# Altium PCB usb-dongle.PcbDoc
Units mm, origin at the board's own origin, x right, y up, seen from the top; angles counter-clockwise.
Board outline 38.85 x 16.25 mm, 2 copper layers (Top Layer, Bottom Layer), stack 0.791 mm thick; 32 components, 21 nets, 136 pads, 141 vias.
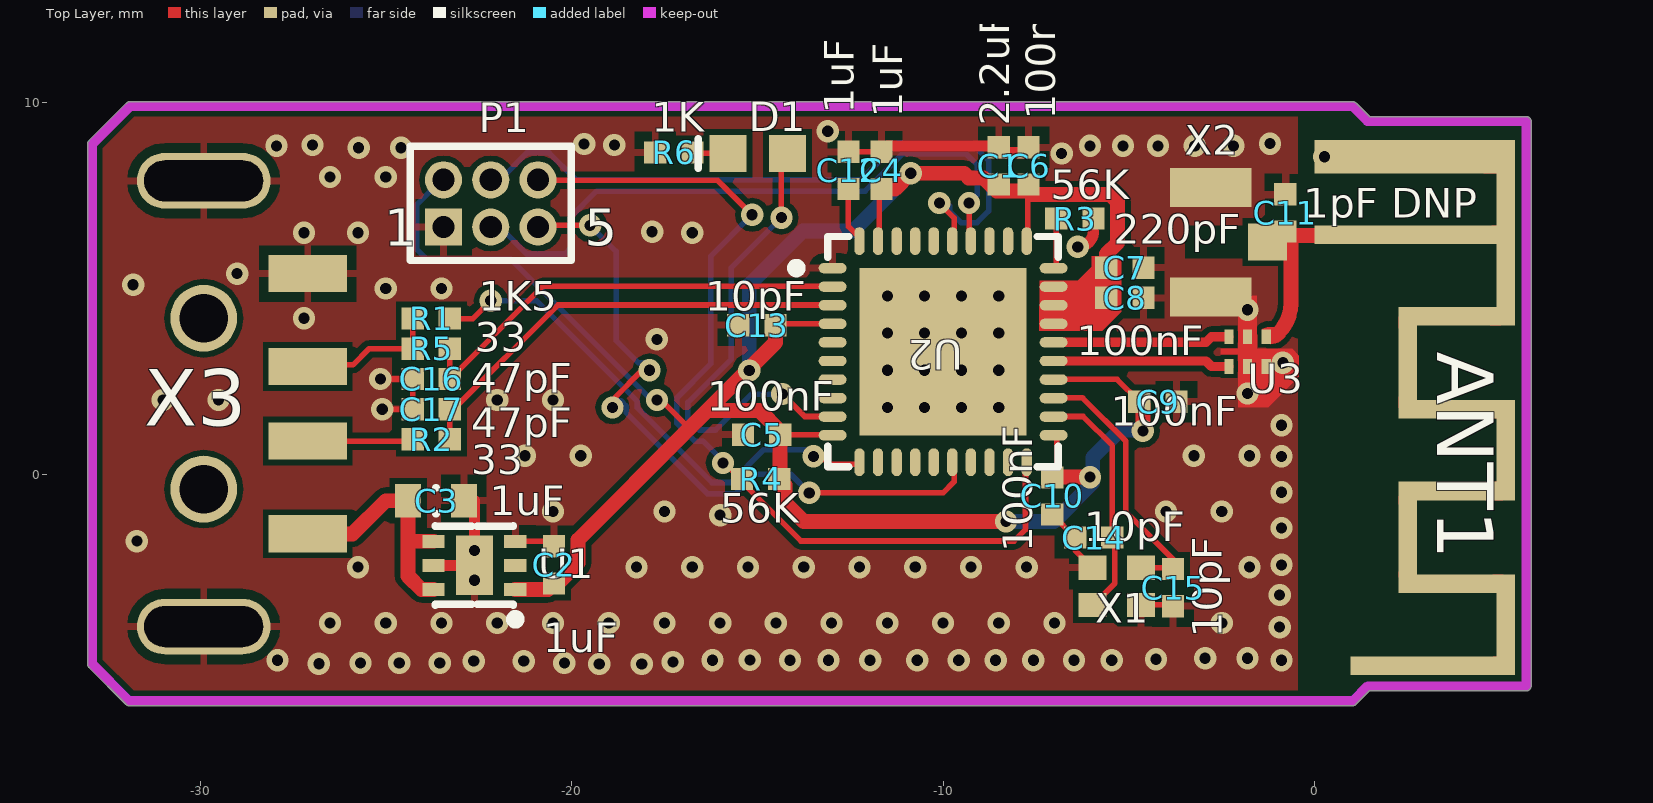
[diagram p0: Top Layer view]
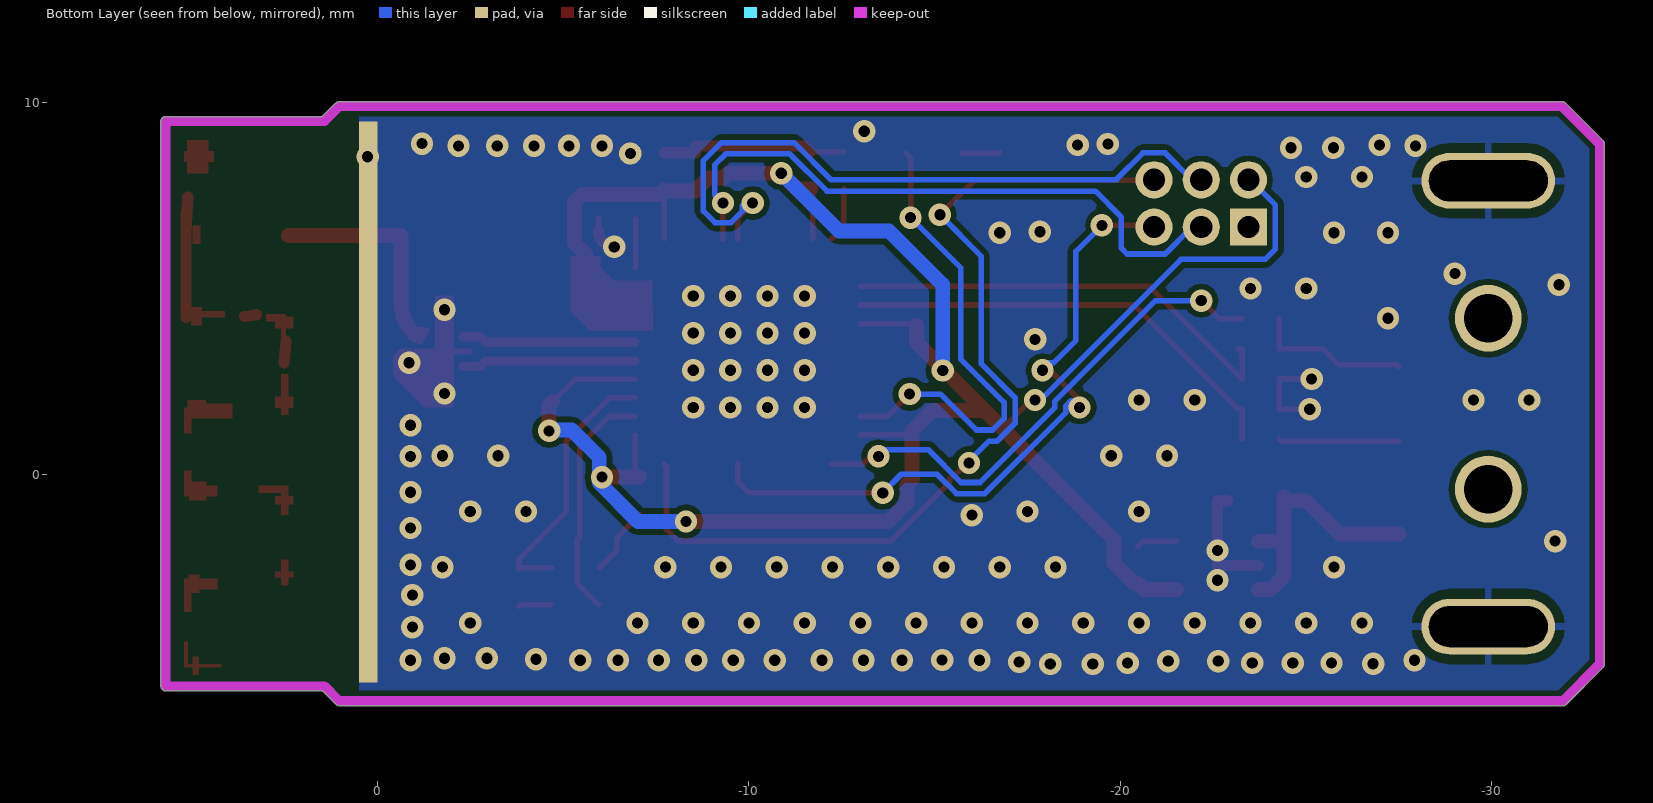
[diagram p1: Bottom Layer view, seen from below]

## Layer stack, top to bottom
Top Solder: solder mask 0.0102, Solder Resist, Dk 3.5
Top Layer: signal copper 0.0356
Dielectric1: core 0.72, FR-4, Dk 4.8
Bottom Layer: signal copper 0.0356
Bottom Solder: solder mask 0.0102, Solder Resist, Dk 3.5

## Board outline
-31.996,-6.19 -32.987,-5.199 -32.987,-5.2 cw(c-32.897,-5.109) -33.025,-5.109 -33.025,8.891 cw(c-32.897,8.891) -32.987,8.982 -32.987,8.981 -31.978,9.99 -31.979,9.99 cw(c-31.888,9.9) -31.888,10.027 1.029,10.027 cw(c1.029,9.9) 1.12,9.99 1.482,9.627 5.7,9.627 cw(c5.7,9.5) 5.827,9.5 5.827,-5.7 cw(c5.7,-5.7) 5.7,-5.827 1.48,-5.827 1.117,-6.19 1.118,-6.19 cw(c1.027,-6.1) 1.027,-6.227 -31.906,-6.227 cw(c-31.906,-6.1)

## Design rules (kind name [scope] priority, off if disabled: settings)
AcuteAngle [All] p1 off: minimum=8.80000000000000E+0001 checktracksonly=FALSE
Clearance Clearance_balun [All vs HasFootprint('LFB182G45BG2D280')] p1: gap=0.1
Clearance Clearance_Normal [All] p2: gap=0.15
ComponentClearance [All] p1: gap=0.2 collisioncheckmode=3 verticalgap=0.2 showdistances=FALSE
FabricationTestPointUsage TestPointUsage [All] p1: valid=0 allowmultiple=FALSE
FabricationTestpoint Testpoint [All] p1: side=3 testpointundercomponent=TRUE minsize=1.016 maxsize=2.54 preferedsize=1.524 minholesize=0 maxholesize=1.016 preferedholesize=0.813 testpointgrid=0.025 allowsidetop=TRUE allowsidebottom=TRUE usegrid=TRUE gridtolerance=0
Height [All] p1 off: minheight=0 maxheight=25.4 prefheight=12.7
HoleSize [All] p1: absolutevalues=TRUE maxlimit=6 minlimit=0.3 maxpercent=80.000 minpercent=20.000
MinimumAnnularRing [All] p1: minimumring=0.15
MinimumSolderMaskSliver [All] p1: minsoldermaskwidth=0.2
PlaneClearance [All] p1: clearance=0.4
PlaneConnect [All] p1: planeconnectstyle=Relief reliefexpansion=0.508 reliefentries=4 reliefconductorwidth=0.2 reliefairgap=0.254
PolygonConnect ufl-plane [InNet('GND') vs HasFootprint('U.FL-R-SMT-1')] p1: connectstyle=Direct reliefconductorwidth=0.254 reliefentries=4 polygonreliefangle="90 Angle" airgapwidth=0.254
PolygonConnect balun_plane [All vs InComponent('U3')] p2: connectstyle=Direct reliefconductorwidth=0.254 reliefentries=4 polygonreliefangle="90 Angle" airgapwidth=0.254
PolygonConnect mifa_plane [InNet('GND') vs HasFootprint('MIFA-2.4GHZ')] p3: connectstyle=Direct reliefconductorwidth=0.254 reliefentries=4 polygonreliefangle="90 Angle" airgapwidth=0.254
PolygonConnect PolygonConnect_Via [IsVia] p4: connectstyle=Direct reliefconductorwidth=0.254 reliefentries=4 polygonreliefangle="90 Angle" airgapwidth=0.254
PolygonConnect [All] p5: connectstyle=Relief reliefconductorwidth=0.2 reliefentries=4 polygonreliefangle="90 Angle" airgapwidth=0.254
RoomDefinition schematic [InComponentClass('schematic')] p1 off: confinementstyle=ConfineIn formatcopy=TRUE lockcomponents=FALSE outline -250,-250 -199.2,-250 -199.2,-224.6 -250,-224.6
RoutingCorners [All] p1: cornerstyle=45-Degree minsetback=1 maxsetback=2.54
RoutingVias [All] p1: holewidth=0.3 width=0.6 viastyle="Through Hole" minholewidth=0.3 minwidth=0.6 maxholewidth=1 maxwidth=4
SMDToCorner [All] p1 off: distance=78740
SMDToPlane [All] p1 off: distance=118110
SilkToSilkClearance [All] p1: silktosilkclearance=0.2
SilkToSolderMaskClearance SilkscreenOverComponentPads [IsPad] p1: minsilkscreentomaskgap=0.2 clearancetoexposedcopper=TRUE
SolderMaskExpansion SolderMaskExpansion_Via [isVia] p1: expansion=-5
SolderMaskExpansion [All] p2: expansion=0.05
ViasUnderSMD [All] p1: allowed=TRUE
Width [All] p1: maxlimit=5 minlimit=0.15 preferedwidth=0.2 minimp=50.000000 maximp=50.000000 favimp=50.000000
18 further rules are at their usual default settings.

## Components (designator, comment, footprint, x,y, rotation, side; value= is the part's Value field where it differs from the comment)
ANT1 "MIFA" MIFA-2.4GHZ 0,9 r270 top locked net-tie
C1 "2.2uF" CAPC1005X05L -8.5,8.3 r90 top
C2 "1uF" CAPC1005X05L -20.472,-2.438 r90 top
C3 "1uF" CAPC1608X08L -23.647,-0.711 r0 top
C4 "1uF" CAPC1005X05L -11.659,8.179 r90 top
C5 "100nF" CAPC1005X05L -14.884,1.067 r180 top
C6 "100nF" CAPC1005X05L -7.7,8.3 r90 top
C7 "220pF" CAPC1005X05L -5.105,5.563 r0 top
C8 "100nF" CAPC1005X05L -5.105,4.75 r0 top
C9 "100nF" CAPC1005X05L -4.216,1.956 r0 top
C10 "100nF" CAPC1005X05L -7.061,-0.584 r270 top
C11 "1pF DNP" CAPC1005X05L -0.787,7.036 r90 top
C12 "1uF" CAPC1005X05L -12.548,8.179 r90 top
C13 "10pF" CAPC1005X05L -15.011,4.013 r180 top
C14 "10pF" CAPC1005X05L -5.944,-1.702 r180 top
C15 "10pF" CAPC1005X05L -3.81,-3.048 r270 top
C16 "47pF" CAPC1005X05L -23.774,2.565 r180 top
C17 "47pF" CAPC1005X05L -23.774,1.753 r180 top
D1 "19-21SURC/S530-A3/TR8" DIOC1608X08N -14.986,8.636 r0 top
P1 "MHDR2X3" MHDR2X3 -23.444,6.655 r0 top
R1 "1K5" RESC1005X04L -23.774,4.191 r0 top
R2 "33" RESC1005X04L -23.774,0.94 r180 top
R3 "56K" RESC1005X04L -6.452,6.883 r180 top
R4 "56K" RESC1005X04L -14.91,-0.127 r180 top
R5 "33" RESC1005X04L -23.774,3.378 r180 top
R6 "1K" RESC1005X04L -17.247,8.661 r0 top
U1 "TPS781330220DRVR" QFN65P200X200X80-6N -22.614,-2.453 r90 top
U2 "CC2531F256RHAR" QFN50P600X600X100-40L-2 -10,3.3 r0 top
U3 "LFB182G45BG2D280" LFB182G45BG2D280 -1.803,3.302 r0 top
X1 "ABM11-32.000MHZ-B7G-T" Abracon-ABM11 -4.674,-2.515 r0 top
X2 "UFL" U.FL-R-SMT-1 -2.794,6.248 r90 top
X3 "1001-011-01101" 1001-011-01101 -29.9,1.9 r90 top

## Footprints (in the part's own frame and the unit in brackets; to place one, negate y for a bottom-side part, rotate by r counter-clockwise, add the part's x,y. Pads: shape width x height; smd on the part's side, far side on the other; paste and mask are expansions set on the pad)
1001-011-01101 [mm] "CNC Tech CONN USB A TYPE ULTRA FLAT SMD"
  round 1.8 hole 1.3 unplated: 0(-2.3,0) 0(2.3,0)
  rect 1x2.1 smd: 1(-3.5,-2.8) 2(-1,-2.8) 3(1,-2.8) 4(3.5,-2.8)
  oval 1.5x3.6 hole 1.1 slot 3.2 at 90 deg: 5(-6,0) 6(6,0)
  body extent -6.2,-3.27 6.2,18.7, height 3.2
Abracon-ABM11 [mm]
  rect 0.75x0.65 smd: 0(-1.3,0) 0(0,-1) 1(-1.3,-1) 2(0,0)
  body extent -1.65,-1.3 0.35,0.3, height 0.59
CAPC1005X05L [mm] "Chip Capacitor, Body 1.1x0.5mm, IPC High Density, EIA 0402"
  rect 0.6x0.6 smd: 1(-0.5,0) 2(0.5,0)
  body extent -0.55,-0.3 0.55,0.3, height 0.6
CAPC1608X08L [mm] "Chip Capacitor, Body 1.6x0.8mm, IPC High Density, EIA 0603"
  rect 0.7x0.9 smd: 1(-0.75,0) 2(0.75,0)
  silkscreen extent -0.01,-0.35 0.01,0.35, body extent -0.9,-0.48 0.9,0.48, height 0.95
DIOC1608X08N [mm] "Chip Diode, Body 1.6x0.8mm, IPC Medium Density"
  rect 1x1 smd: 1(-0.8,0) 2(0.8,0)
  silkscreen extent -1.6,-0.4 -1.6,0.4, body extent -0.87,-0.48 0.87,0.48, height 0.85
LFB182G45BG2D280 [mm] "Murata Balun"
  rect 0.25x0.4 smd mask+0: 1(0.5,0.4) 2(0,0.4) 3(-0.5,0.4) 4(-0.5,-0.4) 5(0,-0.4) 6(0.5,-0.4)
  Top Layer region: -0.251,-0.395 -0.251,-1.5 -0.25,-1.5 -0.249,-1.498 0.561,-1.498 1.382,-0.677
  Top Layer region: -0.25,1.499 -0.25,0.027 -0.236,0.013 0.242,0.013 0.25,0.021 0.25,1.499 0.251,1.5
  Top Layer region: -0.724,0.075 1.202,0.075 1.382,-0.106 1.382,-0.677 -0.215,-0.677 -0.236,-0.664 -0.251,-0.641 -0.251,-0.15 -0.251,-0.069 -0.333,-0.067 -0.721,-0.067
  body extent -0.85,-0.45 0.85,0.45, height 0.7
MHDR2X3 [mm] "Connector; Header; 3x2 Position"
  rect 1x1 hole 0.6: 1(0,0)
  round 1 hole 0.6: 2(0,1.27) 3(1.27,0) 4(1.27,1.27) 5(2.54,0) 6(2.54,1.27)
  silkscreen extent -0.9,-0.9 3.44,2.17
MIFA-2.4GHZ [mm]
  rect 0.9x4.9 smd paste-100 mask-100: 0(0.45,2.45)
  rect 5x0.5 smd paste-100 mask-100: 0(2.5,5.15)
  rect 0.5x2.64 smd paste-100 mask-100: 0(4.75,3.58) 0(7.251,3.58) 0(9.45,3.58) 0(11.95,3.58)
  rect 2x0.5 smd paste-100 mask-100: 0(6,2.51) 0(10.7,2.51)
  rect 15.1x0.5 smd far side paste-100 mask-100: 0(7.05,0.25)
  rect 2.7x0.5 smd paste-100 mask-100: 0(8.35,5.15) 0(13.05,5.15)
  rect 0.5x3.94 smd paste-100 mask-100: 0(14.15,2.93)
  rect 0.5x4.9 smd paste-100 mask-100: 1(2.55,2.45)
  Top Layer region: 9.588,2.261 9.814,2.261 9.814,2.761 9.588,2.761
  Top Layer region: 13.901,4.799 14.401,4.799 14.401,4.981 13.901,4.981
  Top Layer region: 4.756,2.26 5.07,2.26 5.07,2.76 4.756,2.76
  Top Layer region: 6.9,2.26 7.214,2.26 7.214,2.76 6.9,2.76
  Top Layer region: 4.5,4.722 5,4.722 5,5.016 4.5,5.016
  Top Layer region: 2.3,4.764 2.8,4.764 2.8,4.976 2.3,4.976
  Top Layer region: 0,4.544 0.9,4.544 0.9,5.13 0,5.13
  Top Layer region: 7,4.618 7.5,4.618 7.5,5.106 7,5.106
  Top Layer region: 9.2,4.601 9.7,4.601 9.7,5.067 9.2,5.067
  Top Layer region: 11.621,2.26 11.781,2.26 11.781,2.76 11.621,2.76
  Top Layer region: 11.7,4.786 12.2,4.786 12.2,5.088 11.7,5.088
QFN50P600X600X100-40L-2 [mm] "QFN, 40-Leads, Body 6.2x6.2mm (max), Pitch 0.50mm, IPC High Density"
  rect 4.5x4.5 smd paste-1.75 mask+0: 0(0,0)
  oval 0.75x0.28 smd paste-0.025 mask+0.05: 1(-2.975,2.25) 2(-2.975,1.75) 3(-2.975,1.25) 4(-2.975,0.75) 5(-2.975,0.25) 6(-2.975,-0.25) 7(-2.975,-0.75) 8(-2.975,-1.25) 9(-2.975,-1.75) 10(-2.975,-2.25) 21(2.975,-2.25) 22(2.975,-1.75) 23(2.975,-1.25) 24(2.975,-0.75) 25(2.975,-0.25) 26(2.975,0.25) 27(2.975,0.75) 28(2.975,1.25) 29(2.975,1.75) 30(2.975,2.25)
  oval 0.28x0.75 smd paste-0.025 mask+0.05: 11(-2.25,-2.975) 12(-1.75,-2.975) 13(-1.25,-2.975) 14(-0.75,-2.975) 15(-0.25,-2.975) 16(0.25,-2.975) 17(0.75,-2.975) 18(1.25,-2.975) 19(1.75,-2.975) 20(2.25,-2.975) 31(2.25,2.975) 32(1.75,2.975) 33(1.25,2.975) 34(0.75,2.975) 35(0.25,2.975) 36(-0.25,2.975) 37(-0.75,2.975) 38(-1.25,2.975) 39(-1.75,2.975) 40(-2.25,2.975)
  silkscreen extent -4.07,-3.1 3.1,3.1, body extent -3.08,-3.08 3.08,3.08, height 1
QFN65P200X200X80-6N [mm] "QFN, 6-Leads, Body 2.1x2.1mm (max), Pitch 0.65mm, IPC Medium Density"
  rect 0.35x0.6 smd paste-0.05 mask+0.07: 1(-0.65,-1.1) 2(0,-1.1) 3(0.65,-1.1) 4(0.65,1.1) 5(0,1.1) 6(-0.65,1.1)
  rect 1.6x1 smd paste-0.1: 7(0,0)
  silkscreen extent -1.57,-1.23 1.07,1.05, body extent -1.05,-1.05 1.05,1.05, height 0.8
RESC1005X04L [mm] "Chip Resistor, Body 1.1x0.5mm, IPC High Density, EIA 0402"
  rect 0.6x0.6 smd: 1(-0.5,0) 2(0.5,0)
  body extent -0.55,-0.3 0.55,0.3, height 0.4
U.FL-R-SMT-1 [mm]
  rect 1.05x2.2 smd paste-5: 0(-1.475,0) 0(1.475,0)
  rect 1x1.05 smd paste-5: 1(0,-1.525)
  body extent -1.5,-1.5 1.49,1.51, height 1.25

## Part data
ANT1: library part MIFA_Antenna
C1: library part 220nF[[/\]]0603[[/\]]1, "Capacitor"
C2 C4 C12: library part 1uF[[/\]]0402[[/\]]1, "Capacitor"
C3: library part 1uF[[/\]]0603[[/\]]1, "Capacitor"
C5 C6 C7 C8 C9 C10 C13: library part 100nF[[/\]]0402[[/\]]1, "Capacitor"
C11 C14 C15 C16 C17: library part 15pF[[/\]]0402[[/\]]1, "Capacitor"
D1: library part LED, "SMD Red 0603 2V@20ma 56 mcd"
P1: "Header, 3-Pin, Dual row"
R1 R2 R3 R4 R5 R6: library part 0R[[/\]]0402[[/\]]1, "Resistor"
U1: library part TPS781, "150mA LDO"
U2: library part cc2531, "System-on-Chip Solution for IEEE 802.15.4"
U3: library part 2450BM15A0002, "Balun for CC253x"
X1: "32Mhz Crystal, 15ppm"
X2: library part U.FL-R-SMT-1
X3: library part USB-A-Device, "USB CONNECTOR, A TYPE"

## Via types
v1: diameter 0.6, hole 0.3, Top Layer to Bottom Layer, 116 vias
v2: diameter 0.6, hole 0.3, Top Layer to Bottom Layer, tented bottom, 18 vias
v3: diameter 0.6, hole 0.3, Top Layer to Bottom Layer, tented both sides, 7 vias

## Nets (pads, with @x,y where several pads share a name; then routed paths per layer and width w, separated by ;. In a path a pad name is that pad's centre, name@x,y a point inside that pad or via, vN(x,y) a via of type N, cw(c..) or ccw(c..) an arc to the next point about the centre after c; other vN are vias at no path point)
3.3V: C1.1 C2.1 C4.1 C5.1 C6.1 C7.1 C8.1 C9.1 C10.1 C13.1 P1.2 R4.1 U1.1 U2.4 U2.10 U2.21 U2.24 U2.27 U2.28 U2.29 U2.31 U2.39 | length 66.1
  Top Layer w0.15: v1(-17.7,2) v1@-17.7,2.104 ; v1@-17.648,2.052 -16.84,1.245 -16.815,1.245 ; C13.1 -14.469,4.056 U2.4@-12.999,4.056 ; C5.1 -13.01,1.067 U2.10@-12.999,1.056 ; U2.39@-11.717,6.338 -11.717,7.621 C4.1 ; C6.1@-7.722,7.653 -7.717,7.648 U2.31@-7.717,6.338 ; C10.1 -7.053,-0.076 -6.934,0.043 U2.21@-6.934,1.056 ; U2.24@-6.934,2.556 -5.317,2.556 C9.1
  Top Layer w0.4: U1.1 -20.637,-3.103 C2.1 -20.377,-2.938 -19.822,-2.383 -19.822,-1.763 -16.815,1.245 -16.343,1.717 ; C13.1 -14.511,3.548 -16.343,1.717 ; C4.1 -11.295,7.679 v1(-10.871,8.103) -9.435,8.103 -9.311,7.978 -8.91,7.978 -8.56,7.628 -7.747,7.628 C6.1@-7.722,7.653 ; v1(-8.306,-1.27) -13.749,-1.27 -14.25,-0.769 -14.25,-0.287 R4.1 -14.384,-0.102 C5.1 -14.384,1.162 -14.939,1.717 -16.343,1.717 ; C6.1@-7.717,7.648 -7.602,7.533 -5.507,7.533 -5.302,7.328 -5.302,6.233 -5.605,5.93 C7.1 C8.1 ; C10.1@-7.053,-0.076 v1(-6.045,-0.076) ; C9.1 -4.623,1.862 v1(-4.623,1.168)
  Bottom Layer w0.15: P1.2 -23.492,7.925 -24.169,7.248 -24.169,6.062 -23.894,5.786 -21.629,5.786 v1@-17.842,2
  Bottom Layer w0.4: v1(-15.215,2.794) -15.215,5.105 -13.767,6.553 -12.421,6.553 v1(-10.871,8.103) ; v1(-8.306,-1.27) -7.01,-1.27 -5.969,-0.229 -5.969,0.457 -5.232,1.194 v1@-4.623,1.194
DBG_C: P1.3 U2.34 | length 17.2
  Top Layer w0.15: U2.34@-9.3,6.325 v3(-9.3,7.3)
  Bottom Layer w0.15: P1.3 -21.93,6.655 -21.205,5.93 -20.179,5.93 -20.025,6.084 -20.025,6.917 -19.322,7.62 -12.096,7.62 -11.089,8.628 -9.384,8.628 -9.076,8.32 -9.076,7.524 v3(-9.3,7.3)
DBG_D: P1.4 U2.35 | length 18.6
  Top Layer w0.15: v3(-10.1,7.3) -9.7,6.9 U2.35@-9.7,6.325
  Bottom Layer w0.15: P1.4@-21.93,7.925 -21.205,8.65 -20.604,8.65 -19.9,7.946 ; -19.9,7.925 -12.216,7.925 -11.213,8.928 -9.259,8.928 -8.775,8.443 -8.775,7.083 -9.083,6.775 -9.517,6.775 -9.825,7.083 -9.825,7.225 -9.9,7.3 v3(-10.1,7.3)
GND: ANT1.0 C1.2 C2.2 C3.2 C4.2 C5.2 C6.2 C7.2 C8.2 C9.2 C10.2 C11.2 C12.2 C13.2 C14.2 C15.2 C16.2 C17.2 P1.1 R3.1 R6.1 U1.3 U1.5 U1.7 U2.0 U2.1 U3.2 U3.5 U3.6 X1.0 X2.0 X3.4 X3.5 X3.6 | length 20.3
  Top Layer w0.15: v1(-25.146,2.565) C16.2 C17.2 v1(-25.095,1.753) ; U1.3 -20.607,-1.803 C2.2 ; C12.2 C4.2 ; C1.2@-8.56,8.628 -8.56,8.653 C1.2@-8.56,8.839 ; C10.2 C14.2 -6.444,-2.045 X1.0@-5.974,-2.515 ; -5.952,6.545 R3.1 ; X1.0@-4.674,-3.515 -3.843,-3.515 C15.2
  Top Layer w0.3: U1.5 U1.7 v2(-22.614,-2.053) -22.614,-0.711 C3.2 ; C4.2 -11.498,8.839 C1.2@-8.56,8.839 ; C1.2@-8.56,8.653 C6.2@-7.722,8.653 ; v1(-6.375,6.121) ccw(c-6.375,6.545) -5.952,6.545 ; ANT1.0@2.464,3.581 ANT1.0@2.51,3 ; ANT1.0@3.251,4.293 ANT1.0@3.58,4.25 ; ANT1.0@5.105,7.468 ANT1.0@5.15,6.5 ; ANT1.0@5.156,4.216 ANT1.0@5.15,6.5 ; ANT1.0@5.156,7.036 ANT1.0@5.15,6.5
  other v1: -26.8,-5.1 -19.253,-5.105 -18.11,-5.105 -25.679,-5.08 -24.638,-5.08 -23.546,-5.08 -20.193,-5.08 -17.272,-5.055 -22.631,-5.029 -21.285,-5.029 -27.915,-5.004 -16.205,-5.004 -15.2,-5 -14.122,-5.004 -13.081,-5.004 -11.963,-5.004 -10.693,-5.004 -9.576,-5.004 -8.585,-5.004 -7.569,-5.004 -6.477,-5.004 -5.461,-5.004 -0.889,-5.004 -4.267,-4.978 -2.946,-4.953 -1.803,-4.953 -0.94,-4.115 -26.5,-4 -25,-4 -23.5,-4 -22,-4 -20.5,-4 -19,-4 -17.5,-4 -16,-4 -14.5,-4 -13,-4 -11.5,-4 -10,-4 -8.5,-4 -7,-4 -2.5,-4 -0.94,-3.251 -25.75,-2.5 -18.25,-2.5 -16.75,-2.5 -15.25,-2.5 -13.75,-2.5 -12.25,-2.5 -10.75,-2.5 -9.25,-2.5 -7.75,-2.5 -1.75,-2.5 -0.889,-2.438 -0.889,-1.448 -16,-1.1 -20.5,-1 -17.5,-1 -4,-1 -2.5,-1 -0.889,-0.483 -21.25,0.5 -19.75,0.5 -3.25,0.5 -1.75,0.5 -0.889,0.483 -0.889,1.321 -31,2 -29.5,2 -22,2 -20.5,2 -1.803,2.177 -0.853,3.002 -17.704,3.632 -1.803,4.427 -25,5 -23.5,5 -25.75,6.5 -16.75,6.5 -17.831,6.528 -26.5,8 -25,8 0.264,8.548 -6.807,8.636 -25.73,8.788 -24.587,8.788 -27.94,8.839 -6.045,8.839 -5.156,8.839 -4.216,8.839 -3.226,8.839 -2.184,8.839 -26.975,8.865 -18.847,8.865 -19.66,8.89 -1.2,8.9 -13.102,9.233
  other v2: -22.614,-2.853 -11.5,1.8 -10.5,1.8 -9.5,1.8 -8.5,1.8 -11.5,2.8 -10.5,2.8 -9.5,2.8 -8.5,2.8 -11.5,3.8 -10.5,3.8 -9.5,3.8 -8.5,3.8 -11.5,4.8 -10.5,4.8 -9.5,4.8 -8.5,4.8
  other v3: -31.7,-1.8 -27.2,4.2 -31.8,5.1 -29,5.4 -27.2,6.5
NetANT1_1: ANT1.1 C11.1 U3.1 X2.1 | length 5.7
  Top Layer w0.4: -0.965,3.81 ccw(c-1.765,4.61) -0.634,4.61 -0.634,6.426 ANT1.1@2.393,6.426
NetC12_1: C12.1 U2.40 | length 1.5
  Top Layer w0.15: C12.1 -12.548,6.669 U2.40@-12.217,6.338
NetC14_1: C14.1 U2.22 X1.1 | length 6.4
  Top Layer w0.15: U2.22@-6.934,1.556 -6.23,1.556 -5.444,0.77 C14.1 -5.374,-1.772 -5.374,-2.933 -5.955,-3.515 X1.1
NetC15_1: C15.1 U2.23 X1.2 | length 7.2
  Top Layer w0.15: U2.23@-6.934,2.056 -6.247,2.056 -5.08,0.889 -5.08,-1.016 -3.81,-2.286 C15.1 -3.843,-2.515 X1.2
NetD1_1: D1.1 R6.2 | length 1
  Top Layer w0.15: R6.2 -16.721,8.636 D1.1 D1.1@-15.736,8.636
NetD1_2: D1.2 U2.9 | length 12.9
  Top Layer w0.15: v1(-14.351,6.909) -14.351,8.521 D1.2@-14.236,8.636 ; v1(-14.326,2.159) -13.723,1.556 U2.9@-12.999,1.556
  Bottom Layer w0.15: v1(-14.351,6.909) -15.697,5.563 -15.697,3.105 -16.868,1.934 -16.868,1.499 -16.56,1.192 -16.125,1.192 -15.158,2.159 v1(-14.326,2.159)
NetR1_1: R1.1 R5.2 X3.3 | length 4.2
  Top Layer w0.15: X3.3@-27.497,2.891 -27.442,2.946 -25.883,2.946 -25.451,3.378 R5.2 R1.1
NetR1_2: R1.2 U2.11 | length 13.9
  Top Layer w0.15: R1.2 -22.657,4.191 v1(-22.174,4.674) ; v1(-13.487,0.483) -13.284,0.483 -13.075,0.274 U2.11@-12.217,0.274
  Bottom Layer w0.15: v1(-22.174,4.674) -20.94,4.674 -18.229,1.962 -18.229,1.786 -16.222,-0.22 -15.708,-0.22 -14.828,0.66 -13.665,0.66 v1(-13.487,0.483)
NetR2_2: R2.2 X3.2 | length 3.2
  Top Layer w0.15: X3.2@-27.497,0.891 -27.197,0.891 -24.323,0.891 R2.2
NetR3_2: R3.2 U2.30 | length 1.3
  Top Layer w0.15: R3.2 -6.952,5.573 U2.30@-6.934,5.556
NetU2_25: U2.25 U3.4 | length 4.7
  Top Layer w0.25: U2.25@-6.934,3.052 -2.925,3.052 -2.775,2.902 U3.4
NetU2_26: U2.26 U3.3 | length 4.7
  Top Layer w0.25: U2.26@-6.934,3.552 -2.925,3.552 -2.775,3.702 U3.3
RESET: P1.6 R4.2 U2.20 | length 25.3
  Top Layer w0.15: P1.6 -20.89,7.911 -16.064,7.911 v1(-15.138,6.985) ; v1@-15.926,0.356 v1(-15.926,0.305) R4.2 -15.41,-0.21 -13.825,-1.795 -8.088,-1.795 -7.781,-1.487 -7.781,0.209 U2.20@-7.717,0.274
  Bottom Layer w0.15: v1(-15.926,0.305) -15.926,0.356 -16.462,0.892 -16.684,0.892 -17.168,1.375 -17.168,2.059 -16.256,2.97 -16.256,5.867 v1(-15.138,6.985)
UART_TX: P1.5 U2.16 | length 19.2
  Top Layer w0.15: P1.5 -20.859,6.7 v1(-19.5,6.7) ; v1(-18.9,1.8) -18.9,2 -18.046,2.854 -17.954,2.854 v1(-17.9,2.8) ; v1(-13.6,-0.5) -10,-0.5 -9.7,-0.2 U2.16@-9.7,0.3 ; U2.16@-9.717,0.274 -9.703,0.295 U2.16@-9.7,0.299
  Bottom Layer w0.15: v1(-19.5,6.7) -18.8,6 -18.8,3.6 -18.2,3 -17.9,3 v1(-17.9,2.8) ; v1(-18.9,1.8) -18.719,1.981 -18.672,1.981 -18.529,1.838 -18.529,1.662 -16.346,-0.52 -15.584,-0.52 -15.064,0 -14.1,0 v1(-13.6,-0.5)
USB_5V: C3.1 U1.4 U1.6 X3.1 | length 7.1
  Top Layer w0.4: X3.1@-27.497,-1.609 -27.197,-1.609 -25.899,-1.609 -25.001,-0.711 C3.1 ; C3.1@-24.397,-0.61 C3.1 ; U1.6 -24.036,-3.103 -24.403,-2.736 -24.397,-2.731 -24.397,-1.803 ; U1.4 -24.397,-1.803 ; -24.397,-1.803 C3.1
USB_M: C17.1 R2.1 U2.3 | length 12.2
  Top Layer w0.15: R2.1 C17.1 -23.169,1.753 -20.366,4.556 U2.3@-12.999,4.556
USB_P: C16.1 R5.1 U2.2 | length 12.2
  Top Layer w0.15: R5.1@-23.169,3.378 R5.1 C16.1 -20.784,5.056 U2.2@-12.999,5.056
pads on no net: U1.2 U2.5 U2.6 U2.7 U2.8 U2.12 U2.13 U2.14 U2.15 U2.17 U2.18 U2.19 U2.32 U2.33 U2.36 U2.37 U2.38 X3.0

## Polygon pours and split planes (outlines as drawn)
GND on Top Layer "toplayer-gnd" (solid, remove dead copper, pour order 4): -38.303,13.767 -0.457,13.767 -0.457,7.874 -0.457,-7.01 -4.14,-7.01 -40.538,-7.01 -40.538,-7.188
GND on Bottom Layer "botlayer-gnd" (solid, remove dead copper, pour order 6): -35.027,12.802 -35.027,11.735 0.457,11.735 0.483,11.735 0.483,-6.198 0.483,-8.458 -39.116,-8.458

## Keep-outs
Keep-Out Layer:
  lines w0.254: 1.422,9.5 1.429,9.5 ; 4.603,9.5 5.7,9.5 ; 4.699,-5.7 5.7,-5.7 ; 5.7,-2.539 5.7,-5.7 ; 5.7,5.248 5.7,9.5 ; 1.429,9.5 1.029,9.9 -31.888,9.9 -32.897,8.891 -32.897,-5.109 -31.906,-6.1 1.027,-6.1 1.427,-5.7 5.7,-5.7 ; 1.429,9.5 5.7,9.5 ; 5.7,-5.7 5.7,9.5

## Other copper
Top Layer:
  rectangle net GND: 4.4,8.4 5.2,8.7
  rectangle net GND: 2.464,3.378 2.591,4.318
  rectangle net GND: 4.2,-5.2 5.2,-5.1
  rectangle net GND: 5.1,-5.2 5.2,-4.5
  rectangle net GND: 4.3,-3.1 5.2,-2.8
  rectangle net GND: 5,-3.7 5.2,-2.9
  rectangle net GND: 2.4,-3 2.6,-2.3
  rectangle net GND: 2.4,-1.1 2.6,-0.5
  rectangle net GND: 2.4,-0.5 3.2,-0.3
  rectangle net GND: 4.3,-0.6 5.2,-0.3
  rectangle net GND: 5,-0.6 5.2,0.1
  rectangle net GND: 3.9,1.5 5.106,1.9
  rectangle net GND: 5,1.1 5.2,1.8
  rectangle net GND: 2.4,1.6 2.6,2.7
  rectangle net GND: 4.1,4.216 5.156,4.4
  rectangle net GND: 2.464,4.115 2.997,4.318
  pour cut-out: -1.8,6.7 -3.5,6.7 -3.5,5.8 -1.8,5.8
  region net 3.3V: -7.391,5.207 -6.375,5.207 -5.994,5.588 -5.994,5.867 -5.232,5.867 -5.207,5.842 -5.207,4.369 -5.715,3.861 -7.417,3.861
  region net NetANT1_1: -1.194,3.505 ccw(c-1.194,3.996) -0.847,3.649 -0.787,3.708 -1.005,3.926 ccw(c-1.092,3.84) -1.092,3.962 -1.238,3.962 ccw(c-1.238,3.702) -1.422,3.886

## Silkscreen, mask and mechanical layers (free items; w line width, h text height)
Top Solder:
  text "EPFL Mobsya" at -28,-5.6 h1.4
Bottom Solder:
  text "20.02.2014-Rev 1.1-PR-MB" at -8.7,-5.7 h1.4
Outline:
  lines w0.254: 1.422,9.5 1.429,9.5 ; 4.603,9.5 5.7,9.5 ; 4.699,-5.7 5.7,-5.7 ; 5.7,-2.539 5.7,-5.7 ; 5.7,5.248 5.7,9.5 ; 1.429,9.5 5.7,9.5 ; 1.429,9.5 1.029,9.9 -31.888,9.9 -32.897,8.891 -32.897,-5.109 -31.906,-6.1 1.027,-6.1 1.427,-5.7 5.7,-5.7 ; 5.7,-5.7 5.7,9.5
Drill Drawing:
  text ".Legend" at 30.35,-12.875 h2

## Text inside footprints (layer, text, board x,y; h text height)
P1: Top Overlay "1" at -25.044,6.147 h1; Top Overlay "5" at -19.644,6.147 h1